# Altium PCB Buck_Converter.PcbDoc
Units mm, origin at the board's own origin, x right, y up, seen from the top; angles counter-clockwise.
Board outline 40 x 50 mm, 2 copper layers (Top Layer, Bottom Layer); 29 components, 14 nets, 69 pads, 31 vias.
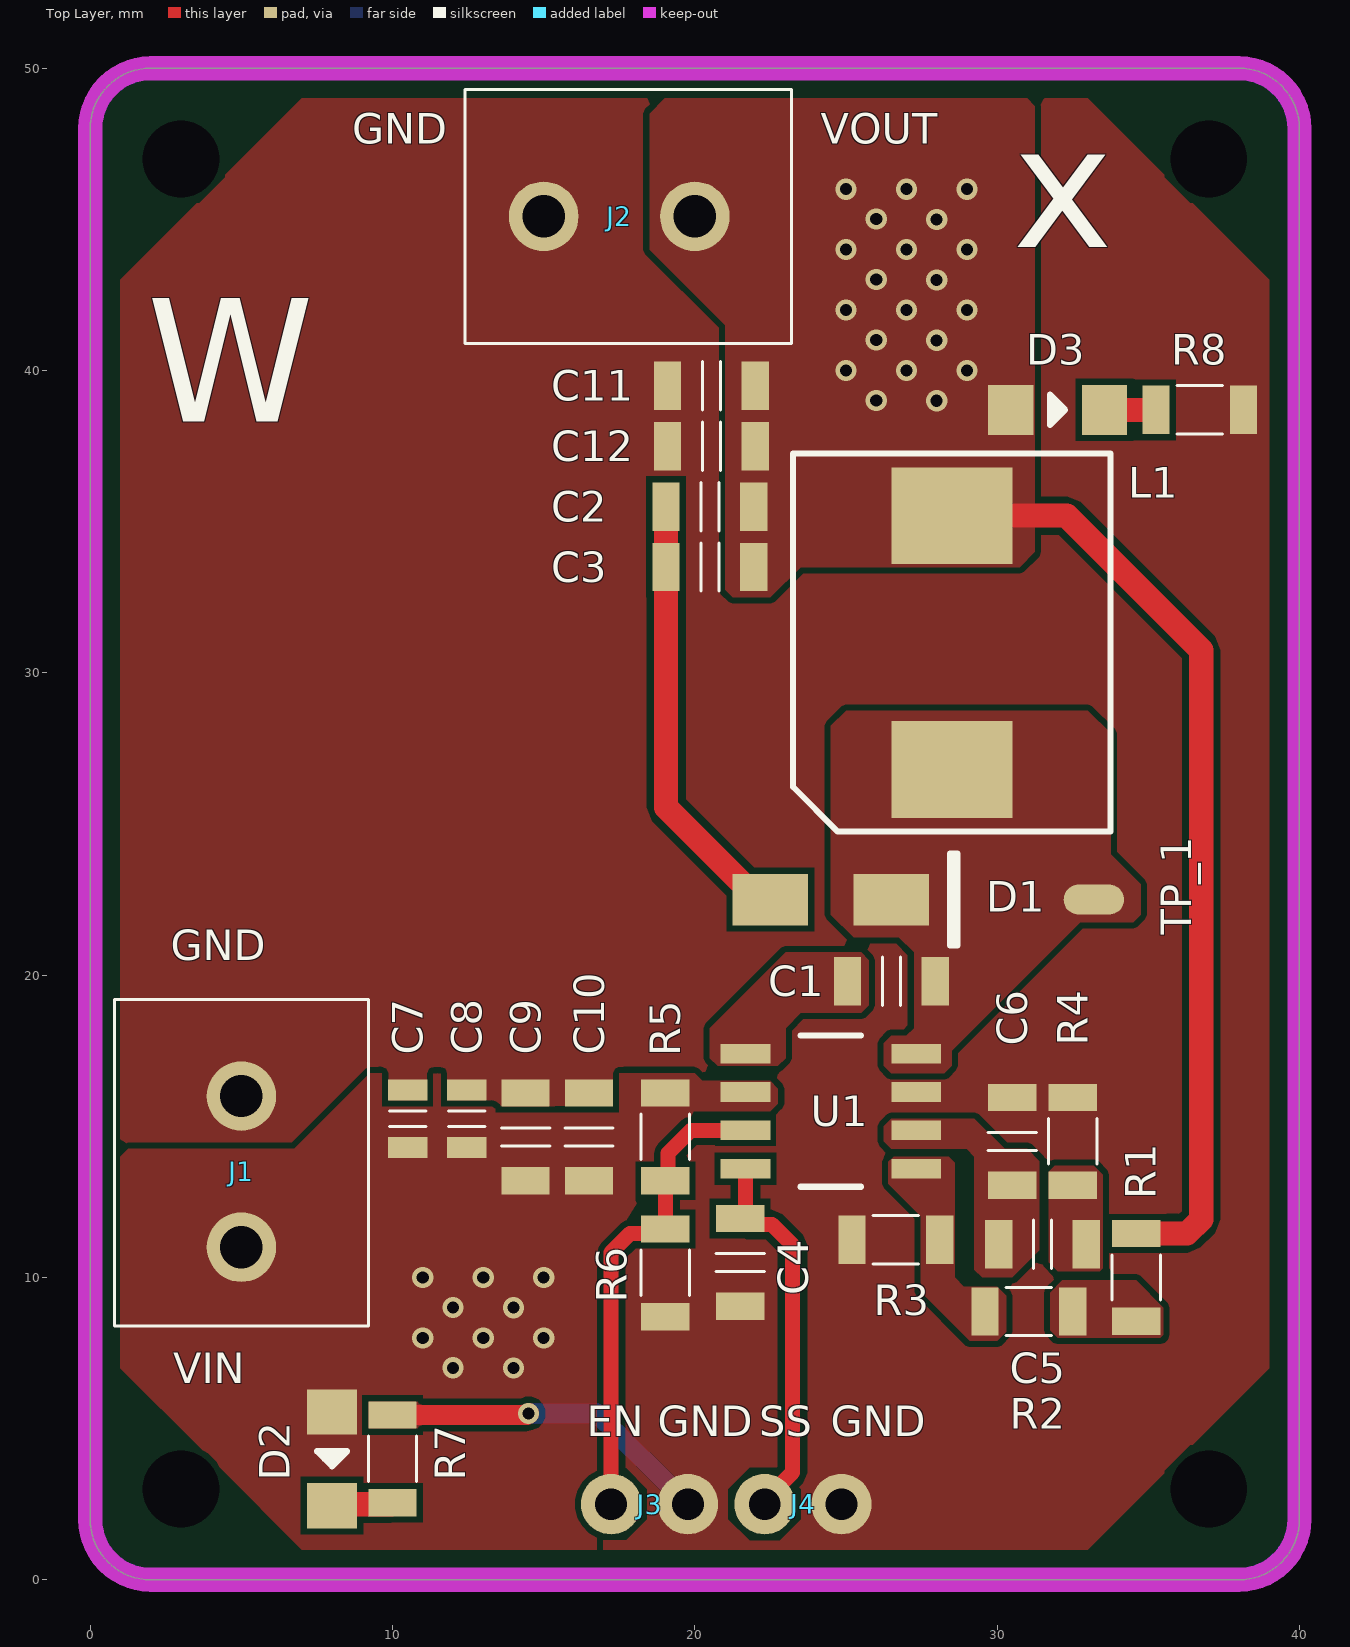
[diagram p0: Top Layer view]
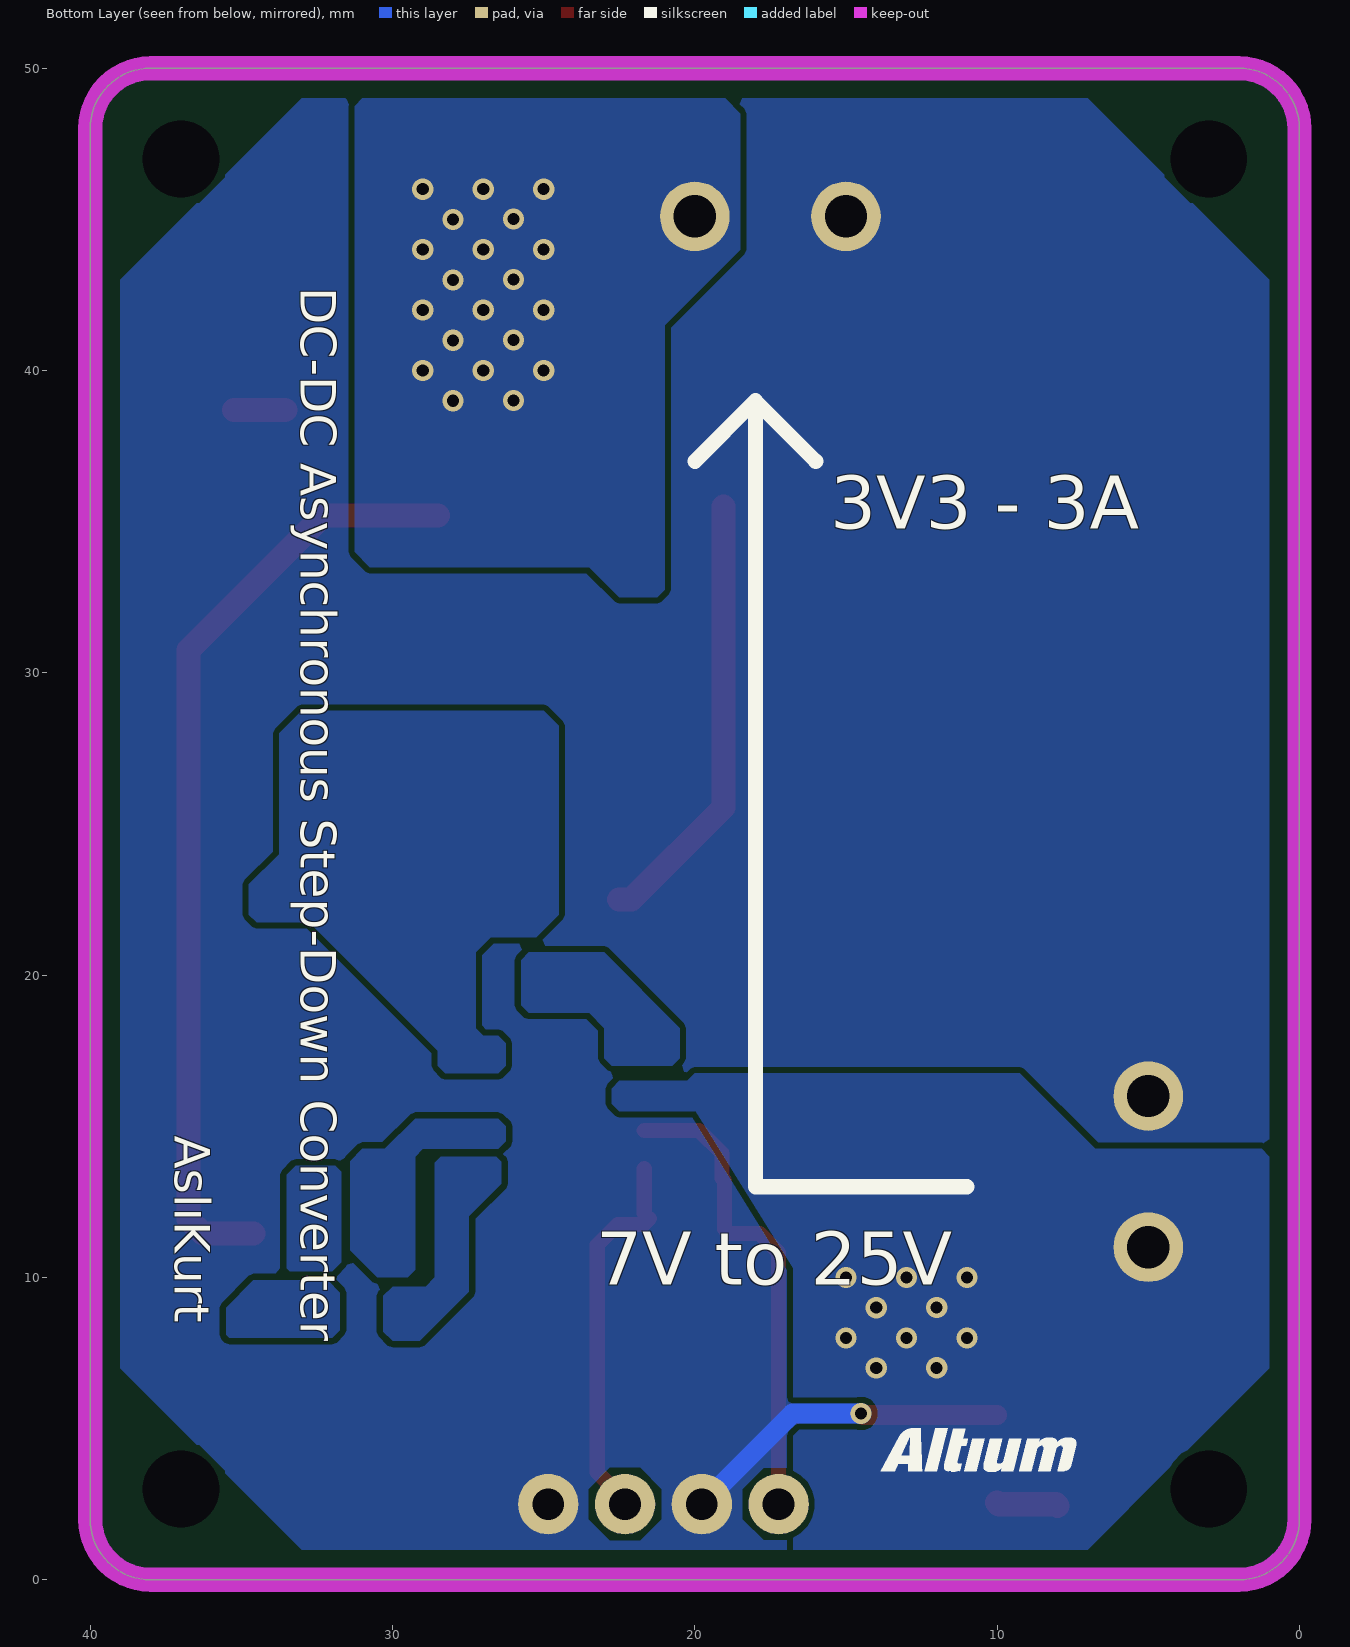
[diagram p1: Bottom Layer view, seen from below]
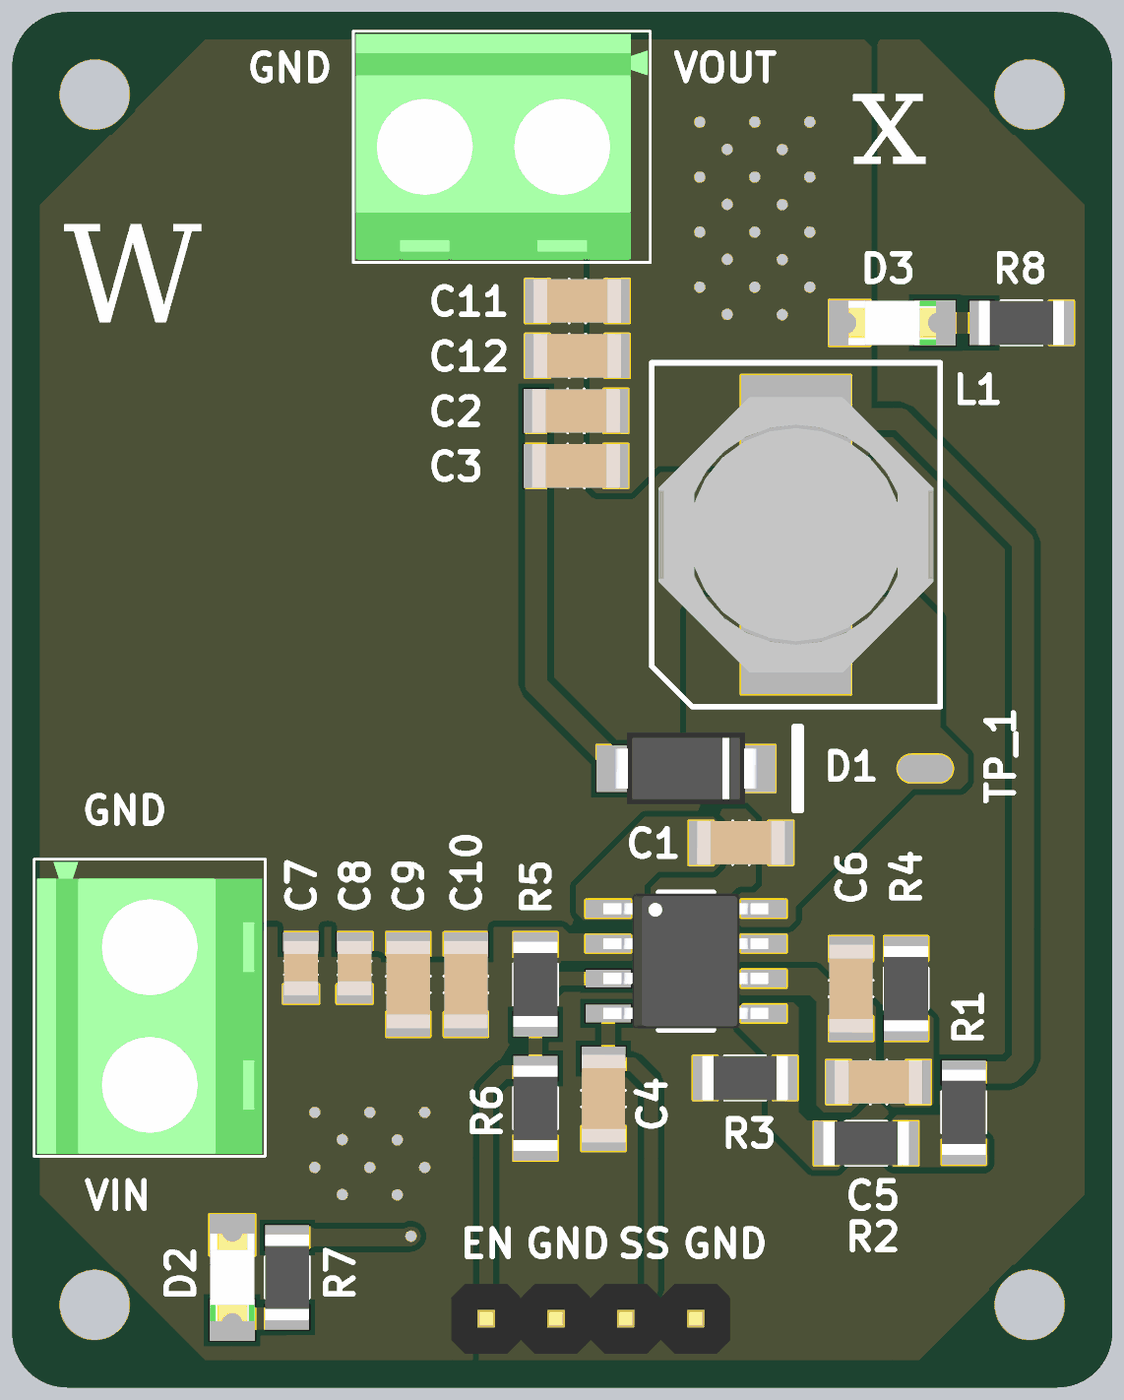
[diagram p2: 3D render of the assembled board from above, using the file's embedded part models]

## Layer stack, top to bottom
Top Solder: solder mask 0.0102, Solder Resist, Dk 3.5
Top Layer: signal copper 0.0356
Dielectric 1: dielectric 0.32, FR-4, Dk 4.8
Bottom Layer: signal copper 0.0356
Bottom Solder: solder mask 0.0102, Solder Resist, Dk 3.5

## Board outline
0,2 0,48 cw(c2,48) 2,50 38,50 cw(c38,48) 40,48 40,2 cw(c38,2) 38,0 2,0 cw(c2,2)

## Design rules (kind name [scope] priority, off if disabled: settings)
Clearance [All] p1: gap=0.2 ignorepadtopadclearanceinfootprint=FALSE except(0.35: Arc-THPad Track-THPad)
ComponentClearance [All] p1: gap=0 collisioncheckmode=3 verticalgap=0 showdistances=FALSE donotcheckwithout3dbody=TRUE
HoleSize [All] p1: absolutevalues=TRUE maxlimit=6.3 minlimit=0.15 maxpercent=80.000 minpercent=20.000
MinimumAnnularRing [All] p1: minimumring=0.15
PlaneClearance [All] p1: clearance=0.3
PlaneConnect [All] p1: planeconnectstyle=Direct reliefexpansion=0.508 reliefentries=4 reliefconductorwidth=0.254 reliefairgap=0.254
PolygonConnect [All] p1: connectstyle=Direct reliefconductorwidth=0.254 reliefentries=4 polygonreliefangle="90 Angle" airgapwidth=0.254
RoutingVias [All] p1: holewidth=0.5 width=0.65 viastyle="Through Hole" minholewidth=0.2 minwidth=0.35 maxholewidth=2 maxwidth=0.35
SilkToSilkClearance [All] p1: silktosilkclearance=0.3
SilkToSolderMaskClearance [IsPad] p1: minsilkscreentomaskgap=0.2 clearancetoexposedcopper=TRUE
SolderMaskExpansion [All] p1: expansion=0.05 istentingtop=FALSE
UnRoutedNet [All] p1: checkbadconnections=TRUE
Width [All] p1: maxlimit=50 minlimit=0.16 preferedwidth=10 minimp=50.000000 maximp=50.000000 favimp=50.000000
23 further rules are at their usual default settings.

## Components (designator, comment, footprint, x,y, rotation, side; value= is the part's Value field where it differs from the comment)
C1 "C1206C104J5RAC7800" CAP_1206 26.5,19.8 r0 top
C2 "GMC31X5R476M25NT" CAP_1206 20.5,35.5 r0 top
C3 "GMC31X5R476M25NT" CAP_1206 20.5,33.5 r0 top
C4 "C1206C104J5RAC7800" CAP_1206 21.5,10.5 r90 top
C5 "C3216C0G2J102J085AA" CAP_1206 31.5,11.1 r180 top
C6 "C1206C470J5GAC7800" CAP_1206 30.5,14.5 r270 top
C7 "CL21A475KAQNNNE" CAP_0805 10.5,15.25 r270 top
C8 "CL21A475KAQNNNE" CAP_0805 12.45,15.25 r270 top
C9 "C1206C104J5RAC7800" CAP_1206 14.4,14.65 r270 top
C10 "C3216C0G2J103J160AA" CAP_1206 16.5,14.65 r270 top
C11 "C1206C104J5RAC7800" CAP_1206 20.55,39.5 r0 top
C12 "C3216C0G2J103J160AA" CAP_1206 20.55,37.5 r0 top
D1 "B340AE-13" SMA 24.5,22.5 r0 top
D2 "150120BS75000" LED_BLUE_1206 8,4 r90 top
D3 "150120GS75000" LED_GREEN_1206 32,38.7 r180 top
J1 "282836-2" TERMINAL 5,13.5 r90 top
J2 "282836-2" TERMINAL 17.5,45.1 r0 top
J3 "2x1 Male Header 2.54mm" "2x1 Male Header 2.54mm" 18.5,2.5 r180 top
J4 "2x1 Male Header 2.54mm" "2x1 Male Header 2.54mm" 23.58,2.5 r180 top
L1 "SRI1004" IND_1010 28.5,31 r90 top
R1 "PMR18EZPJ000" RES_1206 34.6,10 r90 top
R2 "RC1206JR-0710KL" RES_1206 31.05,8.875 r0 top
R3 "RC1206JR-073K3L" RES_1206 26.65,11.25 r0 top
R4 "RES 33K OHM 5% 1/4W 1206" RES_1206 32.5,14.5 r270 top
R5 "RES 330K OHM 5% 1/4W 1206" RES_1206 19.025,14.65 r90 top
R6 "RES 68K OHM 5% 1/4W 1206" RES_1206 19.025,10.15 r90 top
R7 "RC1206FR-07680RL" RES_1206 10,4 r270 top
R8 "RC1206FR-07680RL" RES_1206 36.7,38.7 r180 top
U1 "IC REG BUCK ADJ 3A 8SOIC" SOIC8_PAD 24.5,15.5 r0 top

## Footprints (in the part's own frame and the unit in brackets; to place one, negate y for a bottom-side part, rotate by r counter-clockwise, add the part's x,y. Pads: shape width x height; smd on the part's side, far side on the other; paste and mask are expansions set on the pad)
"2x1 Male Header 2.54mm" [mm]
  round 2 hole 1.05 mask+0.05: 1(-1.27,0) 2(1.27,0)
  body extent -2.54,-1.27 2.54,1.27, height 8.54
CAP_0805 [mm]
  rect 0.7x1.3 smd mask+0.05: 1(-0.95,0) 2(0.95,0)
  silkscreen extent -0.25,-0.6 0.25,0.6, body extent -1,-0.63 1,0.63, height 0.6
CAP_1206 [mm]
  rect 0.9x1.6 smd mask+0.05: 1(-1.45,0) 2(1.45,0)
  silkscreen extent -0.3,-0.8 0.3,0.8, body extent -1.6,-0.8 1.6,0.8, height 0.79
IND_1010 [mm] "10.00 x 10.00 x 4.50mm"
  rect 3.2x4 smd mask+0.05: 1(-4.2,0) 2(4.2,0)
  silkscreen extent -6.25,-5.25 6.25,5.25, body extent -5,-5 5,5, height 3.8
LED_BLUE_1206 [mm]
  rect 1.5x1.66 smd mask+0.05: 1(-1.55,0) 2(1.55,0)
  silkscreen extent -0.25,-0.5 0.25,0.5, body extent -1.6,-0.8 1.6,0.8, height 0.68
LED_GREEN_1206 [mm]
  rect 1.5x1.66 smd mask+0.05: 1(-1.55,0) 2(1.55,0)
  silkscreen extent -0.25,-0.5 0.25,0.5, body extent -1.6,-0.8 1.6,0.8, height 0.68
RES_1206 [mm]
  rect 0.9x1.6 smd mask+0.05: 1(-1.45,0) 2(1.45,0)
  silkscreen extent -0.75,-0.8 0.75,0.8, body extent -1.55,-0.8 1.55,0.8, height 0.65
SMA [mm]
  rect 2.5x1.7 smd mask+0.05: 1(-2,0) 2(2,0)
  silkscreen extent 3.94,-1.52 4.19,1.52, body extent -2.6,-1.3 2.6,1.3, height 2.4
SOIC8_PAD [mm] "SOIC, 8-Leads, Body 4,90x3,90mm, Pitch 1,27mm, Thermal Pad 3,45x2,56mm, IPC Low Density"
  rect 1.65x0.65 smd: 1(-2.825,1.905) 2(-2.825,0.635) 3(-2.825,-0.635) 4(-2.825,-1.905) 5(2.825,-1.905) 6(2.825,-0.635) 7(2.825,0.635) 8(2.825,1.905)
  silkscreen extent -1,-2.5 1,2.5, body extent -3,-2.45 3,2.45, height 1.75
TERMINAL [mm] "5MM"
  round 2.3 hole 1.4 mask+0.05: 1(-2.5,0) 2(2.5,0)
  silkscreen extent -5.1,-4.2 5.7,4.2, body extent -5,-4.1 5.6,4.1, height 10

## Part data
C1 C4 C9 C11: library part "CAP CER 100nF 1206", "CAP CER 0.1UF 50V X7R 1206", Capacitance=100nF, Case Code (Metric)=3216, Case Code (Imperial)=1206, Dielectric=X7R, Manufacturer="Kyocera AVX", Manufacturer Part Number=12065C104JAT2A, Max Operating Temperature=125°C, Min Operating Temperature=-55°C, Package Quantity=4000, Supplier Part Number 1=1441626, Tolerance=5%, Voltage Rating=50V, Case/Package=1206, Category="Ceramic Capacitors", ComponentLink1Description=https://datasheet.ciiva.com/26915/getdatasheetpartid-87553-26915356.pdf?src-supplier=Verical, ComponentLink1URL=https://datasheet.ciiva.com/26915/getdatasheetpartid-87553-26915356.pdf?src-supplier=Verical, ComponentLink2Description=https://datasheet.ciiva.com/27747/740463-27747550.pdf?src-supplier=Jameco, ComponentLink2URL=https://datasheet.ciiva.com/27747/740463-27747550.pdf?src-supplier=Jameco, ComponentLink3Description=https://datasheet.ciiva.com/7094/1818074-7094222.pdf?src-supplier=Newark, ComponentLink3URL=https://datasheet.ciiva.com/7094/1818074-7094222.pdf?src-supplier=Newark, ComponentLink4Description=https://datasheet.ciiva.com/11463/cx7r-11463226.pdf?src-supplier=Avnet, ComponentLink4URL=https://datasheet.ciiva.com/11463/cx7r-11463226.pdf?src-supplier=Avnet, ComponentLink5Description=https://datasheet.ciiva.com/16318/cx7r-16318250.pdf?src-supplier=Future+Electronics, ComponentLink5URL=https://datasheet.ciiva.com/16318/cx7r-16318250.pdf?src-supplier=Future+Electronics, ComponentLink6Description=https://datasheet.ciiva.com/11505/cx7r-11505336.pdf?src-supplier=Avnet, ComponentLink6URL=https://datasheet.ciiva.com/11505/cx7r-11505336.pdf?src-supplier=Avnet, ComponentLink7Description=https://datasheet.ciiva.com/7833/84526-7833657.pdf?src-supplier=Element14, ComponentLink7URL=https://datasheet.ciiva.com/7833/84526-7833657.pdf?src-supplier=Element14, ComponentLink8Description=https://datasheet.ciiva.com/8081/1679506-8081368.pdf?src-supplier=Element14, ComponentLink8URL=https://datasheet.ciiva.com/8081/1679506-8081368.pdf?src-supplier=Element14, ComponentLink9Description=https://datasheet.ciiva.com/7833/cx7r-7833399.pdf?src-supplier=Element14, ComponentLink9URL=https://datasheet.ciiva.com/7833/cx7r-7833399.pdf?src-supplier=Element14, ComponentLink10Description=https://datasheet.ciiva.com/152/cx7r-152041.pdf?src-supplier=Digikey, ComponentLink10URL=https://datasheet.ciiva.com/152/cx7r-152041.pdf?src-supplier=Digikey, ComponentLink11Description=https://datasheet.ciiva.com/152/cx7r-152040.pdf?src-supplier=Digikey, ComponentLink11URL=https://datasheet.ciiva.com/152/cx7r-152040.pdf?src-supplier=Digikey, ComponentLink12Description=https://datasheet.ciiva.com/152/cx7r-152042.pdf?src-supplier=Digikey, ComponentLink12URL=https://datasheet.ciiva.com/152/cx7r-152042.pdf?src-supplier=Digikey, ComponentLink13Description=https://datasheet.ciiva.com/14604/70001075-14604380.pdf?src-supplier=Allied+Electronics, ComponentLink13URL=https://datasheet.ciiva.com/14604/70001075-14604380.pdf?src-supplier=Allied+Electronics, DesignedBy="Aslı Kurt", Height=0.5mm, Lead Free=5697LeadFree, Length=3.2mm, Material=4241ConductorMaterial, Mount="Surface Mount", Packaging="Cut Tape", Pricing 1="4000=0,049, 12000=0,048 (GBP)", Pricing 2="4000=0,04296 (USD)", Pricing 3="4000=0,0373, 12000=0,0364, 20000=0,036, 60000=0,0351, 100000=0,0344 (USD)", Pricing 4="1=0,22, 10=0,105, 50=0,105, 100=0,066, 1000=0,062, 10000=0,041 (USD)", RoHS=Yes, RoHS Compliant=Yes, Series=-, Stock 1=8700, Stock 2=40000, Stock 3=916000, Stock 4=79343, Supplier 1=Rs, Supplier 2=Avnet, Supplier 3="Future Electronics", Supplier 4=Mouser, Supplier Part Number 2=KGM31BR71H104JT, Supplier Part Number 3=1247949, Supplier Part Number 4=581-12065C104J, Termination=SMD/SMT, Voltage Rating (DC)=50V, Weight=0.000571oz, Width=1.6mm
C2 C3: library part "CAP CER 47uF 1206", "CAP CER 47UF 25V X5R 1206", Capacitance=47uF, Case/Package=1206, Manufacturer="Cal-Chip Electronics", Max Operating Temperature=85°C, Min Operating Temperature=-55°C, Supplier Part Number 1=4713-GMC31X5R476M25NTCT-ND, Tolerance=20%, Voltage Rating=25V, Category="Ceramic Capacitors", ComponentLink1Description=http://www.calchipelectronics.com/pdf/gmc_series.pdf?src-supplier=Digikey, ComponentLink1URL=http://www.calchipelectronics.com/pdf/gmc_series.pdf?src-supplier=Digikey, DesignedBy="Aslı Kurt", Manufacturer Part Number=GMC31X5R476M25NT, Mount="Surface Mount", Pricing 1="1=0,99, 10=0,613, 50=0,4602, 100=0,4126, 500=0,33138, 1000=0,30602 (USD)", Pricing 2="1=0,99, 10=0,613, 50=0,4602, 100=0,4126, 500=0,33138, 1000=0,30602 (USD)", Pricing 3="2000=0,28788, 4000=0,27032, 6000=0,26149, 10000=0,25165, 14000=0,24588, 20000=0,24032 (USD)", RoHS=Yes, Series=GMC, Stock 1=38887, Stock 2=38887, Stock 3=38000, Supplier 1=Digikey, Supplier 2=Digikey, Supplier 3=Digikey, Supplier Part Number 2=4713-GMC31X5R476M25NTDKR-ND, Supplier Part Number 3=4713-GMC31X5R476M25NTTR-ND
C5: library part "CAP CER 1nF 1206", "CAP CER 1nF 1206", Capacitance=1nF, Manufacturer=TDK, Supplier Part Number 1=810-C3216C0G2J102J, Category="Ceramic Capacitors", ComponentLink1Description=https://datasheet.ciiva.com/24219/c3216c0g2j102j085aa-265301-24219668.pdf?src-supplier=Mouser, ComponentLink1URL=https://datasheet.ciiva.com/24219/c3216c0g2j102j085aa-265301-24219668.pdf?src-supplier=Mouser, ComponentLink2Description=https://datasheet.ciiva.com/11788/0900766b80fc5cba-11788148.pdf?src-supplier=Rs, ComponentLink2URL=https://datasheet.ciiva.com/11788/0900766b80fc5cba-11788148.pdf?src-supplier=Rs, ComponentLink3Description=https://datasheet.ciiva.com/7726/1484596-7726604.pdf?src-supplier=Element14, ComponentLink3URL=https://datasheet.ciiva.com/7726/1484596-7726604.pdf?src-supplier=Element14, DesignedBy="Aslı Kurt", Manufacturer Part Number=C3216C0G2J102J085AA, Material=4241ConductorMaterial, Pricing 1="1=0,26, 10=0,115, 50=0,115, 100=0,072, 1000=0,062, 10000=0,048 (USD)", Pricing 2="1=0,27, 10=0,154, 50=0,1098, 100=0,0961, 500=0,07266, 1000=0,06537 (USD)", RoHS=Yes, Stock 1=6821, Stock 2=72988, Supplier 1=Mouser, Supplier 2=Digikey, Supplier Part Number 2=445-2342-1-ND
C6: library part "CAP CER 47pF 1206", "CAP CER 47PF 50V C0G/NP0 1206", Capacitance=47pF, Case Code (Metric)=3216, Case Code (Imperial)=1206, Dielectric=C0G, Dielectric Material=Ceramic, Manufacturer=KEMET, Manufacturer Part Number=C1206C470J5GACTU, Max Operating Temperature=125°C, Min Operating Temperature=-55°C, Package Quantity=1, Supplier Part Number 1=80-C1206C470J5GACTU, Temperature Coefficient=30ppm/°C, Tolerance=5%, Voltage=50V, Case/Package=1206, Category="Ceramic Capacitors", ComponentLink1Description=https://datasheet.ciiva.com/7729/1691965-7729914.pdf?src-supplier=Element14, ComponentLink1URL=https://datasheet.ciiva.com/7729/1691965-7729914.pdf?src-supplier=Element14, ComponentLink2Description=https://datasheet.ciiva.com/7729/1691965-7729913.pdf?src-supplier=Element14, ComponentLink2URL=https://datasheet.ciiva.com/7729/1691965-7729913.pdf?src-supplier=Element14, ComponentLink3Description=https://datasheet.ciiva.com/28668/1789732-28668879.pdf?src-supplier=Element14, ComponentLink3URL=https://datasheet.ciiva.com/28668/1789732-28668879.pdf?src-supplier=Element14, ComponentLink4Description=https://datasheet.ciiva.com/14598/70095383-14598902.pdf?src-supplier=Allied+Electronics, ComponentLink4URL=https://datasheet.ciiva.com/14598/70095383-14598902.pdf?src-supplier=Allied+Electronics, ComponentLink5Description=https://datasheet.ciiva.com/14598/70095383-14598719.pdf?src-supplier=Allied+Electronics, ComponentLink5URL=https://datasheet.ciiva.com/14598/70095383-14598719.pdf?src-supplier=Allied+Electronics, ComponentLink6Description=https://datasheet.ciiva.com/11463/kem-c1003-c0g-smd-11463659.pdf?src-supplier=Avnet, ComponentLink6URL=https://datasheet.ciiva.com/11463/kem-c1003-c0g-smd-11463659.pdf?src-supplier=Avnet, ComponentLink7Description=https://datasheet.ciiva.com/2988/kem-c1003-c0g-smd-2988767.pdf?src-supplier=Avnet, ComponentLink7URL=https://datasheet.ciiva.com/2988/kem-c1003-c0g-smd-2988767.pdf?src-supplier=Avnet, Construction=Flat, Depth=1.6mm, Dissipation Factor=0.1%, Height=0.78mm, Lead Free=5697LeadFree, Length=3.2mm, Material=4241ConductorMaterial, Mount="Surface Mount,PCB", Packaging="Tape and Reel", Pricing 1="1=0,18, 10=0,089, 50=0,089, 100=0,051, 1000=0,035, 10000=0,026 (USD)", Pricing 2="500=0,022, 1000=0,019, 1500=0,017 (GBP)", Pricing 3="4000=0,0232, 8000=0,021, 24000=0,02 (USD)", Pricing 4="1=0,2, 10=0,112, 50=0,0788, 100=0,0685, 500=0,05114, 1000=0,04574 (USD)", Reach SVHC Compliant=No, RoHS=Yes, RoHS Compliant=Yes, Series=C, Stock 1=9133, Stock 2=8000, Stock 3=12000, Stock 4=41465, Supplier 1=Mouser, Supplier 2=Rs, Supplier 3="Arrow Electronics", Supplier 4=Digikey, Supplier Part Number 2=8029999, Supplier Part Number 3=C1206C470J5GACTU, Supplier Part Number 4=399-C1206C470J5GAC7800CT-ND, Termination=SMD/SMT, Thickness=0.035inch, Voltage Rating=50V, Voltage Rating (AC)=50V, Voltage Rating (DC)=50V, Width=0.063inch
C7 C8: library part "CAP CER 4.7uF 0805", "CAP CER 4.7uF %10 0805", Capacitance=4.7uF, Case Code (Metric)=2012, Case Code (Imperial)=0805, Dielectric=X5R, Manufacturer=Samsung, Max Operating Temperature=85°C, Min Operating Temperature=-55°C, Package Quantity=1, Supplier Part Number 1=1276-1244-1-ND, Tolerance=10%, Voltage Rating=25V, Case/Package=0805, Category="Ceramic Capacitors", ComponentLink1Description=https://datasheet.ciiva.com/25798/cl21a475kaqnnne-25798882.pdf?src-supplier=Digi-Key, ComponentLink1URL=https://datasheet.ciiva.com/25798/cl21a475kaqnnne-25798882.pdf?src-supplier=Digi-Key, Construction=Flat, Depth=1.25mm, Designed by=BERK, Height=1.25mm, Lead Free="Lead Free", Length=2mm, Manufacturer Part Number=CL21A475KAQNNNE, Mount="Surface Mount", Packaging="Tape and Reel", Pricing 1="1=0,11000, 10=0,08100, 50=0,04580, 100=0,03800, 500=0,02664, 1000=0,02205 (USD)", Radiation Hardening=No, RoHS=Yes, RoHS Compliant=Yes, Series=CL, Stock 1=1477018, Supplier 1=Digi-Key, Thickness=0.055inch, Voltage Rating (DC)=25V, Width=0.049inch
C10 C12: library part "CAP CER 10nF 1206", "CAP CER 10nF 1206", Capacitance=10nF, Manufacturer=TDK, Supplier Part Number 1=1795135, Temperature Coefficient=30ppm/°C, Category="Ceramic Capacitors", ComponentLink1Description=http://www.mouser.com/ds/2/400/lcc_commercial_highvoltage_en-520036.pdf?src-supplier=Mouser, ComponentLink1URL=http://www.mouser.com/ds/2/400/lcc_commercial_highvoltage_en-520036.pdf?src-supplier=Mouser, ComponentLink2Description=https://datasheet.octopart.com/C3216C0G2J103J160AA-TDK-datasheet-43914167.pdf?src-supplier=Newark, ComponentLink2URL=https://datasheet.octopart.com/C3216C0G2J103J160AA-TDK-datasheet-43914167.pdf?src-supplier=Newark, ComponentLink3Description=https://product.tdk.com/info/en/documents/chara_sheet/C3216C0G2J103J160AA.pdf?src-supplier=Digikey, ComponentLink3URL=https://product.tdk.com/info/en/documents/chara_sheet/C3216C0G2J103J160AA.pdf?src-supplier=Digikey, ComponentLink4Description=https://product.tdk.com/info/en/catalog/spec/mlccspec_commercial_general_midvoltage_en.pdf?src-supplier=Digikey, ComponentLink4URL=https://product.tdk.com/info/en/catalog/spec/mlccspec_commercial_general_midvoltage_en.pdf?src-supplier=Digikey, ComponentLink5Description=http://product.tdk.com/en/catalog/datasheets/mlcc_commercial_midvoltage_en.pdf?src-supplier=Avnet, ComponentLink5URL=http://product.tdk.com/en/catalog/datasheets/mlcc_commercial_midvoltage_en.pdf?src-supplier=Avnet, ComponentLink6Description=https://datasheet.octopart.com/C3216C0G2J103J160AA-TDK-datasheet-41194876.pdf?src-supplier=Future+Electronics, ComponentLink6URL=https://datasheet.octopart.com/C3216C0G2J103J160AA-TDK-datasheet-41194876.pdf?src-supplier=Future+Electronics, DesignedBy="Aslı Kurt", Lead Free=5697LeadFree, Manufacturer Part Number=C3216C0G2J103J160AA, Material=4241ConductorMaterial, Pricing 1="2000=0,092, 6000=0,095 (GBP)", Pricing 2="1=0,53, 10=0,316, 50=0,231, 100=0,2046, 500=0,1596, 1000=0,14555 (USD)", Pricing 3="264=0,1004 (USD)", Pricing 4="1=0,405, 15=0,32, 50=0,285, 250=0,235, 1000=0,195 (USD)", RoHS=Yes, Stock 1=9940, Stock 2=35379, Stock 3=264, Stock 4=1420, Supplier 1=Rs, Supplier 2=Digikey, Supplier 3="Arrow Electronics", Supplier 4="Future Electronics", Supplier Part Number 2=445-14625-1-ND, Supplier Part Number 3=C3216C0G2J103J160AA, Supplier Part Number 4=6103616
D1: library part B340A, "Rectifier Diode Schottky 40V 3A 2-Pin SMA T/R", Forward Current=3A, Manufacturer=Diodes, Supplier Part Number 1=B340AE-13DICT-ND, Category="Schottky Diodes", ComponentLink1Description=https://www.diodes.com/assets/Datasheets/B320AE-B345AE.pdf?src-supplier=Digikey, ComponentLink1URL=https://www.diodes.com/assets/Datasheets/B320AE-B345AE.pdf?src-supplier=Digikey, DesignedBy="Aslı Kurt", Manufacturer Part Number=B340AE-13, Pricing 1="1=0,37, 10=0,248, 100=0,1671, 500=0,1296, 1000=0,1171, 2000=0,10643 (USD)", Pricing 2="1=0,37, 10=0,248, 100=0,1671, 500=0,1296, 1000=0,1171, 2000=0,10643 (USD)", RoHS=Yes, Stock 1=232201, Stock 2=232201, Supplier 1=Digikey, Supplier 2=Digikey, Supplier Part Number 2=B340AE-13DIDKR-ND
D2: library part "LED BLUE 1206", "Led, Blue, 470 Nm, 3.2 V, 30 Ma, 145 Mcd Rohs Compliant: Yes", Case Code (Metric)=3216, Case Code (Imperial)=1206, Color=Blue, Forward Current=30mA, Forward Voltage=3.2V, Lens Color=Colorless, Manufacturer="Wurth Electronics", Max Operating Temperature=85°C, Min Operating Temperature=-40°C, Package Quantity=1, Supplier Part Number 1=8154243P, Test Current=20mA, Case/Package=1206, Category=LEDs, ComponentLink1Description=https://datasheet.ciiva.com/22656/150120bs75000-22656976.pdf?src-supplier=Element14, ComponentLink1URL=https://datasheet.ciiva.com/22656/150120bs75000-22656976.pdf?src-supplier=Element14, ComponentLink2Description=https://datasheet.ciiva.com/29279/759440-da-01-en-chipled-1206-w-kl-blau-150120bs75000-29279045.pdf?src-supplier=Conrad, ComponentLink2URL=https://datasheet.ciiva.com/29279/759440-da-01-en-chipled-1206-w-kl-blau-150120bs75000-29279045.pdf?src-supplier=Conrad, ComponentLink3Description=https://datasheet.ciiva.com/29561/150120bs75000-29561882.pdf?src-supplier=Digikey, ComponentLink3URL=https://datasheet.ciiva.com/29561/150120bs75000-29561882.pdf?src-supplier=Digikey, DesignedBy="Aslı Kurt", Dominant Wavelength=470nm, Height=0.69mm, Length=3.2mm, Lens Size=1.6mm, Lens Style=Clear,Flat,Rectangular, Lens Transparency=Clear, Luminous Intensity=145mcd, Manufacturer Part Number=150120BS75000, Mount="Surface Mount", Packaging="Cut Tape", Pricing 1="500=0,119, 750=0,113, 1500=0,11, 3000=0,104 (GBP)", Pricing 2="5=0,251, 10=0,213, 100=0,172, 500=0,156, 1000=0,153 (EUR)", Pricing 3="1=0,22, 50=0,211, 100=0,182, 500=0,158 (USD)", Pricing 4="1=0,23, 10=0,225, 50=0,211, 100=0,182, 1000=0,165, 10000=0,165 (USD)", Reach SVHC Compliant=Unknown, RoHS=Yes, RoHS Compliant=Yes, Series=WL-SMCW, Stock 1=2200, Stock 2=4482, Stock 3=25240, Stock 4=4085, Supplier 1=Rs, Supplier 2=Farnell, Supplier 3=Digikey, Supplier 4=Mouser, Supplier Part Number 2=2322084, Supplier Part Number 3=732-4989-1-ND, Supplier Part Number 4=710-150120BS75000, Viewing Angle=140°, Wavelength=470nm, Width=1.6mm
D3: library part "LED GREEN 1206", "WL-SMCW SMT Mono-Color Chip LED Waterclear", Case Code (Metric)=3216, Case Code (Imperial)=1206, Color=Green, Forward Current=30mA, Forward Voltage=3.2V, Lens Color=Colorless, Manufacturer="Wurth Electronics", Max Operating Temperature=85°C, Max Reverse Voltage (DC)=5V, Min Operating Temperature=-40°C, Package Quantity=1, Power Dissipation=105mW, Supplier Part Number 1=8154247P, Test Current=20mA, Case/Package=1206, Category=LEDs, ComponentLink1Description=https://datasheet.ciiva.com/22656/150120gs75000-22656979.pdf?src-supplier=Element14, ComponentLink1URL=https://datasheet.ciiva.com/22656/150120gs75000-22656979.pdf?src-supplier=Element14, ComponentLink2Description=https://datasheet.ciiva.com/29279/759441-da-01-en-chipled-1206-w-kl-gruen-150120gs75000-29279042.pdf?src-supplier=Conrad, ComponentLink2URL=https://datasheet.ciiva.com/29279/759441-da-01-en-chipled-1206-w-kl-gruen-150120gs75000-29279042.pdf?src-supplier=Conrad, ComponentLink3Description=https://datasheet.ciiva.com/48430/150120gs75000-eng-tds-48430053.pdf?src-supplier=Distrelec, ComponentLink3URL=https://datasheet.ciiva.com/48430/150120gs75000-eng-tds-48430053.pdf?src-supplier=Distrelec, ComponentLink4Description=https://datasheet.ciiva.com/29561/150120gs75000-29561884.pdf?src-supplier=Digikey, ComponentLink4URL=https://datasheet.ciiva.com/29561/150120gs75000-29561884.pdf?src-supplier=Digikey, ComponentLink5Description=https://datasheet.ciiva.com/29561/150120gs75000-29561883.pdf?src-supplier=Digikey, ComponentLink5URL=https://datasheet.ciiva.com/29561/150120gs75000-29561883.pdf?src-supplier=Digikey, ComponentLink6Description=https://datasheet.ciiva.com/29561/150120gs75000-29561885.pdf?src-supplier=Digikey, ComponentLink6URL=https://datasheet.ciiva.com/29561/150120gs75000-29561885.pdf?src-supplier=Digikey, DesignedBy="Aslı Kurt", Dominant Wavelength=520nm, Height=0.69mm, Length=3.2mm, Lens Size=1.6mm, Lens Style=Clear,Flat,Rectangular, Lens Transparency=Clear, Luminous Intensity=450mcd, Manufacturer Part Number=150120GS75000, Mount="Surface Mount", Packaging="Cut Tape", Pricing 1="500=0,119, 750=0,113, 1500=0,11, 3000=0,104 (GBP)", Pricing 2="100=0,172, 500=0,156, 1000=0,153 (EUR)", Pricing 3="1=0,23, 10=0,225, 50=0,211, 100=0,182, 1000=0,165, 10000=0,165 (USD)", Pricing 4="1=0,22, 50=0,211, 100=0,182, 500=0,158 (USD)", Reach SVHC Compliant=Unknown, Reverse Voltage=5V, RoHS=Yes, RoHS Compliant=Yes, Series=WL-SMCW, Stock 1=4450, Stock 2=6145, Stock 3=4986, Stock 4=22547, Supplier 1=Rs, Supplier 2=Farnell, Supplier 3=Mouser, Supplier 4=Digikey, Supplier Part Number 2=2322085RL, Supplier Part Number 3=710-150120GS75000, Supplier Part Number 4=732-4990-1-ND, Viewing Angle=140°, Wavelength=520nm, Width=1.6mm
J1 J2: library part "2x1 TERMINAL 5mm", "Connector, Terminal Block; Wire Receptacle; 2 Pos.; 16-30 AWG; 0.197 in. CL; Sid", Color=Green, Current=13.5A, Flammability Rating="UL94 V-0", Manufacturer="TE Connectivity", Max Operating Temperature=105°C, Max Supply Voltage (AC)=300V, Min Operating Temperature=-40°C, Package Quantity=300, Supplier Part Number 1=A98076-ND, Voltage Rating (DC)=250V, Approvals=UL, Category="Terminal Blocks", Closed End="No (Without)", ComponentLink1Description=https://datasheet.ciiva.com/7628/1731782-7628513.pdf?src-supplier=Element14, ComponentLink1URL=https://datasheet.ciiva.com/7628/1731782-7628513.pdf?src-supplier=Element14, ComponentLink2Description=https://datasheet.ciiva.com/16393/282836-2-16393382.pdf?src-supplier=Future+Electronics, ComponentLink2URL=https://datasheet.ciiva.com/16393/282836-2-16393382.pdf?src-supplier=Future+Electronics, ComponentLink3Description=https://datasheet.ciiva.com/15169/getdatasheetpartid-155855-15169553.pdf?src-supplier=Verical, ComponentLink3URL=https://datasheet.ciiva.com/15169/getdatasheetpartid-155855-15169553.pdf?src-supplier=Verical, ComponentLink4Description=https://datasheet.ciiva.com/11757/0900766b8002dc8a-11757385.pdf?src-supplier=Rs, ComponentLink4URL=https://datasheet.ciiva.com/11757/0900766b8002dc8a-11757385.pdf?src-supplier=Rs, ComponentLink5Description=https://datasheet.ciiva.com/823/eng-cd-282836-h10-823437.pdf?src-supplier=Digikey, ComponentLink5URL=https://datasheet.ciiva.com/823/eng-cd-282836-h10-823437.pdf?src-supplier=Digikey, ComponentLink6Description=https://datasheet.ciiva.com/3141/eng-cs-1308389-eurostyle-terminal-blocks-0607-3141118.pdf?src-supplier=Avnet, ComponentLink6URL=https://datasheet.ciiva.com/3141/eng-cs-1308389-eurostyle-terminal-blocks-0607-3141118.pdf?src-supplier=Avnet, ComponentLink7Description=https://datasheet.ciiva.com/30261/eng-cs-1308389-eurostyle-terminal-blocks-0607-30261813.pdf?src-supplier=Onlinecomponents.com, ComponentLink7URL=https://datasheet.ciiva.com/30261/eng-cs-1308389-eurostyle-terminal-blocks-0607-30261813.pdf?src-supplier=Onlinecomponents.com, Connector System=5937ConnectorSystem, Connector Type=Receptacle, Contact Material=Brass, Contact Plating=Tin, Current Rating=13.5A, Depth=8.2mm, Designed by="Aslı Kurt", ELV=Compliant, Housing Color=Green, Housing Material=Polyamide, Lead Free="Lead Free", Length=10.6mm, Manufacturer Part Number=282836-2, Max Current Rating=13.5A, Max Voltage Rating (AC)=300V, Mount="Through Hole", Number of Circuits=2, Number of Contacts=2, Number of Levels=1, Number of Poles=2, Number of Positions=2, Number of Positions Per Level=2, Number of Rows=1, Operating Supply Voltage=300V, Orientation=Straight, Packaging=Tray, Pitch=5mm, Plating=Brass, Pricing 1="1=0,6, 10=0,578, 25=0,576, 50=0,5566, 100=0,4666, 300=0,43743, 600=0,41315, 1200=0,36211, 5100=0,31593 (USD)", Radiation Hardening=No, Reach SVHC Compliant=Unknown, RoHS=Yes, RoHS Compliant=Yes, Screw Flange="No (Without)", Screwless Terminal Block="No (Without)", Series=Buchanan, Side Stackable="Yes (With)", Stock 1=33835, Supplier 1=Digikey, Tail Length=3.5mm, Termination=Solder, Thread Size=M3, Voltage=300V, Voltage Rating=300V, Width=10mm, Wire Gauge (Max)=30AWG, Wire Gauge (Min)=30AWG, Wire/Cable Gauge=30AWG, Insulation Material=Nylon, Interlock="Yes (With)"
L1: library part "IND 10uH", "10uH 10X10 4.8A - SMD Güç Bobini - SRI1004", Current=4.8A, Tolerance=20%, Inductance=10uH, ComponentLink1Description=Direncnet, ComponentLink1URL=https://www.direnc.net/10uh-10x10-48a-smd-guc-bobini-sri1004, ComponentLink2Description=Datasheet, ComponentLink2URL=https://pdf.direnc.net/upload/10uh-10x10-4-8a-smd-guc-bobini-sri1004-datasheet.pdf, DesignedBy="Aslı Kurt", Producer=CoreMaster
R1: library part "RES 0 OHM 1206", "Res Thick Film 1206 0 Ohm 5% Molded SMD Paper T/R", Case/Package=340Case, Manufacturer=Rohm, Max Current Rating=38.7A, Max Operating Temperature=155°C, Min Operating Temperature=-55°C, Resistance=0R, Supplier Part Number 1=3099053, Temperature Coefficient=100ppm/°C, Category="Chip SMD Resistors", ComponentLink1Description=https://datasheet.octopart.com/PMR18EZPJ000-Rohm-datasheet-115132289.pdf?src-supplier=Future+Electronics, ComponentLink1URL=https://datasheet.octopart.com/PMR18EZPJ000-Rohm-datasheet-115132289.pdf?src-supplier=Future+Electronics, DesignedBy="Aslı Kurt", Height=420um, Manufacturer Part Number=PMR18EZPJ000, Pricing 1="5000=0,154, 10000=0,151, 15000=0,149, 20000=0,148, 25000=0,144 (USD)", Pricing 2="1=0,94, 10=0,539, 25=0,438, 50=0,3766, 100=0,3254, 250=0,27044, 500=0,23676, 1000=0,20858 (USD)", RoHS=Yes, Stock 1=10000, Stock 2=20524, Supplier 1="Future Electronics", Supplier 2=Digikey, Supplier Part Number 2=846-PMR18EZPJ000CT-ND
R2: library part "RES 10K OHM 1206", "RES 10K OHM 5% 1/4W 1206", Case Code (Metric)=3216, Case Code (Imperial)=1206, Manufacturer=Yageo, Max Operating Temperature=155°C, Max Power Dissipation=250mW, Min Operating Temperature=-55°C, Package Quantity=1, Resistance=10kR, Resistance Tolerance=5%, Resistor Type="Thick Film", Supplier Part Number 1=4750733, Temperature Coefficient=100ppm/°C, Voltage Rating=200V, Case/Package=1206, Category="Chip SMD Resistors", ComponentLink1Description=https://datasheet.ciiva.com/29154/402664-da-01-en-smd-widerstand-chip1206-10-kohm-29154546.pdf?src-supplier=Conrad, ComponentLink1URL=https://datasheet.ciiva.com/29154/402664-da-01-en-smd-widerstand-chip1206-10-kohm-29154546.pdf?src-supplier=Conrad, ComponentLink2Description=https://datasheet.ciiva.com/7983/444357-7983813.pdf?src-supplier=Element14, ComponentLink2URL=https://datasheet.ciiva.com/7983/444357-7983813.pdf?src-supplier=Element14, ComponentLink3Description=https://datasheet.ciiva.com/2458/pyu-rc1206-51-rohs-l-4-2458636.pdf?src-supplier=Digikey, ComponentLink3URL=https://datasheet.ciiva.com/2458/pyu-rc1206-51-rohs-l-4-2458636.pdf?src-supplier=Digikey, ComponentLink4Description=https://datasheet.ciiva.com/2458/pyu-rc1206-51-rohs-l-4-2458637.pdf?src-supplier=Digikey, ComponentLink4URL=https://datasheet.ciiva.com/2458/pyu-rc1206-51-rohs-l-4-2458637.pdf?src-supplier=Digikey, ComponentLink5Description=https://datasheet.ciiva.com/2458/pyu-rc1206-51-rohs-l-4-2458635.pdf?src-supplier=Digikey, ComponentLink5URL=https://datasheet.ciiva.com/2458/pyu-rc1206-51-rohs-l-4-2458635.pdf?src-supplier=Digikey, DesignedBy="Aslı Kurt", Height=0.026inch, Lead Free="Lead Free", Length=0.122inch, Manufacturer Part Number=RC1206JR-0710KL, Number of Terminations=2, Packaging="Cut Tape", Power Rating=250mW, Pricing 1="5000=0,0034, 20000=0,0033, 75000=0,0031, 200000=0,003, 500000=0,0029 (USD)", Pricing 2="1=0,1, 10=0,024, 50=0,022, 100=0,0194, 500=0,01224, 1000=0,0102 (USD)", Reach SVHC Compliant=Unknown, RoHS=Yes, RoHS Compliant=Yes, Series=RC1206, Stock 1=145000, Stock 2=179700, Supplier 1="Future Electronics", Supplier 2=Digikey, Supplier Part Number 2=311-10KERCT-ND, Termination=SMD/SMT, Tolerance=5%, Voltage Rating (AC)=200V, Width=0.063inch
R3: library part "RES 3K3 OHM 1206", "RES 3.3K OHM 5% 1/4W 1206", Manufacturer=Yageo, Resistance=3.3kR, Supplier Part Number 1=9240586, Category="Chip SMD Resistors", ComponentLink1Description=https://datasheet.ciiva.com/29181/402605-da-01-en-smd-widerstand-chip1206-3-3-kohm-29181477.pdf?src-supplier=Conrad, ComponentLink1URL=https://datasheet.ciiva.com/29181/402605-da-01-en-smd-widerstand-chip1206-3-3-kohm-29181477.pdf?src-supplier=Conrad, ComponentLink2Description=https://datasheet.ciiva.com/2458/pyu-r-int-thick-7-2458662.pdf?src-supplier=Digikey, ComponentLink2URL=https://datasheet.ciiva.com/2458/pyu-r-int-thick-7-2458662.pdf?src-supplier=Digikey, ComponentLink3Description=https://datasheet.ciiva.com/2458/pyu-r-int-thick-7-2458663.pdf?src-supplier=Digikey, ComponentLink3URL=https://datasheet.ciiva.com/2458/pyu-r-int-thick-7-2458663.pdf?src-supplier=Digikey, ComponentLink4Description=https://datasheet.ciiva.com/2458/pyu-r-int-thick-7-2458664.pdf?src-supplier=Digikey, ComponentLink4URL=https://datasheet.ciiva.com/2458/pyu-r-int-thick-7-2458664.pdf?src-supplier=Digikey, ComponentLink5Description=https://datasheet.ciiva.com/7857/444357-7857499.pdf?src-supplier=Element14, ComponentLink5URL=https://datasheet.ciiva.com/7857/444357-7857499.pdf?src-supplier=Element14, ComponentLink6Description=https://datasheet.ciiva.com/7857/444357-7857500.pdf?src-supplier=Element14, ComponentLink6URL=https://datasheet.ciiva.com/7857/444357-7857500.pdf?src-supplier=Element14, DesignedBy="Aslı Kurt", Lead Free=5697LeadFree, Manufacturer Part Number=RC1206JR-073K3L, Pricing 1="10=0,0172, 100=0,0107, 500=0,0094, 1000=0,0081, 2500=0,0059, 5000=0,0037, 25000=0,0036, 50000=0,0035 (EUR)", Pricing 2="1=0,1, 10=0,025, 50=0,0158, 100=0,0133, 500=0,0092, 1000=0,00796 (USD)", RoHS=Yes, Stock 1=157764, Stock 2=317191, Supplier 1=Farnell, Supplier 2=Digikey, Supplier Part Number 2=311-3.3KERCT-ND
R4: library part "RES 33K OHM 1206", "SMD Chip Resistor, 33 kOhm, ï¿½ 5%, 250 mW, 1206 [3216 Metric], Thick Film, General Purpose", Manufacturer=Yageo, Manufacturer Part Number=RC1206JR-0733KL, Resistance=33kR, Supplier Part Number 1=311-33KERCT-ND, Voltage Rating (AC)=200V, Category="Chip SMD Resistors", ComponentLink1Description=https://datasheet.ciiva.com/29181/402729-da-01-en-smd-widerstand-chip1206-33-kohm-29181369.pdf?src-supplier=Conrad, ComponentLink1URL=https://datasheet.ciiva.com/29181/402729-da-01-en-smd-widerstand-chip1206-33-kohm-29181369.pdf?src-supplier=Conrad, ComponentLink2Description=https://datasheet.ciiva.com/7857/444357-7857487.pdf?src-supplier=Element14, ComponentLink2URL=https://datasheet.ciiva.com/7857/444357-7857487.pdf?src-supplier=Element14, ComponentLink3Description=https://datasheet.ciiva.com/16747/pyu-rc1206-51-rohs-l-4-16747052.pdf?src-supplier=Future+Electronics, ComponentLink3URL=https://datasheet.ciiva.com/16747/pyu-rc1206-51-rohs-l-4-16747052.pdf?src-supplier=Future+Electronics, DesignedBy="Aslı Kurt", Lead Free=5697LeadFree, Pricing 1="1=0,1, 10=0,023, 50=0,0184, 100=0,0133, 500=0,01122, 1000=0,00918 (USD)", Pricing 2="5000=0,0036, 20000=0,0035, 75000=0,0033, 200000=0,0032, 500000=0,0031 (USD)", RoHS=Yes, Stock 1=425111, Stock 2=75000, Supplier 1=Digikey, Supplier 2="Future Electronics", Supplier Part Number 2=1124239
R5: library part "RES 330K OHM 1206", Manufacturer=Yageo, Manufacturer Part Number=RC1206JR-07330KL, Resistance=330kR, Supplier Part Number 1=311-330KERCT-ND, Category="Chip SMD Resistors", ComponentLink1Description=https://datasheet.ciiva.com/29181/402842-da-01-en-smd-widerstand-chip1206-330-kohm-29181410.pdf?src-supplier=Conrad, ComponentLink1URL=https://datasheet.ciiva.com/29181/402842-da-01-en-smd-widerstand-chip1206-330-kohm-29181410.pdf?src-supplier=Conrad, ComponentLink2Description=https://datasheet.ciiva.com/2520/pyu-r-int-thick-7-2520647.pdf?src-supplier=Digikey, ComponentLink2URL=https://datasheet.ciiva.com/2520/pyu-r-int-thick-7-2520647.pdf?src-supplier=Digikey, ComponentLink3Description=https://datasheet.ciiva.com/2520/pyu-r-int-thick-7-2520648.pdf?src-supplier=Digikey, ComponentLink3URL=https://datasheet.ciiva.com/2520/pyu-r-int-thick-7-2520648.pdf?src-supplier=Digikey, ComponentLink4Description=https://datasheet.ciiva.com/2520/pyu-r-int-thick-7-2520649.pdf?src-supplier=Digikey, ComponentLink4URL=https://datasheet.ciiva.com/2520/pyu-r-int-thick-7-2520649.pdf?src-supplier=Digikey, ComponentLink5Description=https://datasheet.ciiva.com/7857/444357-7857483.pdf?src-supplier=Element14, ComponentLink5URL=https://datasheet.ciiva.com/7857/444357-7857483.pdf?src-supplier=Element14, ComponentLink6Description=https://datasheet.ciiva.com/7857/444357-7857484.pdf?src-supplier=Element14, ComponentLink6URL=https://datasheet.ciiva.com/7857/444357-7857484.pdf?src-supplier=Element14, ComponentLink7Description=https://datasheet.ciiva.com/28639/1675737-28639914.pdf?src-supplier=Element14, ComponentLink7URL=https://datasheet.ciiva.com/28639/1675737-28639914.pdf?src-supplier=Element14, ComponentLink8Description=https://datasheet.ciiva.com/17422/pyu-rc1206-51-rohs-l-4-17422334.pdf?src-supplier=Future+Electronics, ComponentLink8URL=https://datasheet.ciiva.com/17422/pyu-rc1206-51-rohs-l-4-17422334.pdf?src-supplier=Future+Electronics, DesignedBy="Aslı Kurt", Pricing 1="1=0,1, 10=0,023, 50=0,0188, 100=0,0143, 500=0,01274, 1000=0,01122 (USD)", RoHS=Yes, Stock 1=93095, Supplier 1=Digikey
R6: library part "RES 68K OHM 1206", Manufacturer=Yageo, Manufacturer Part Number=RC1206JR-0768KL, Resistance=68kR, Supplier Part Number 1=311-68KERCT-ND, Voltage Rating (AC)=200V, Category="Chip SMD Resistors", ComponentLink1Description=https://datasheet.ciiva.com/7857/444357-7857527.pdf?src-supplier=Element14, ComponentLink1URL=https://datasheet.ciiva.com/7857/444357-7857527.pdf?src-supplier=Element14, ComponentLink2Description=https://datasheet.ciiva.com/7857/444357-7857528.pdf?src-supplier=Element14, ComponentLink2URL=https://datasheet.ciiva.com/7857/444357-7857528.pdf?src-supplier=Element14, DesignedBy="Aslı Kurt", Lead Free=5697LeadFree, Pricing 1="1=0,1, 10=0,022, 50=0,0188, 100=0,0153, 500=0,01122, 1000=0,00918 (USD)", Pricing 2="1=0,1, 10=0,022, 50=0,0188, 100=0,0153, 500=0,01122, 1000=0,00918 (USD)", RoHS=Yes, Stock 1=105931, Stock 2=105931, Supplier 1=Digikey, Supplier 2=Digikey, Supplier Part Number 2=311-68KERDKR-ND
R7 R8: library part "RES 680 OHM 1206", "SMD Chip Resistor, 680 Ohm, ï¿½ 1%, 250 mW, 1206 [3216 Metric], Thick Film, General Purpose", Manufacturer=Yageo, Resistance=680R, Supplier Part Number 1=8645095, Voltage Rating (AC)=200V, Category="Chip SMD Resistors", ComponentLink1Description=https://datasheet.ciiva.com/11819/0900766b80c6630a-11819964.pdf?src-supplier=Rs, ComponentLink1URL=https://datasheet.ciiva.com/11819/0900766b80c6630a-11819964.pdf?src-supplier=Rs, ComponentLink2Description=https://datasheet.ciiva.com/7857/444357-7857386.pdf?src-supplier=Element14, ComponentLink2URL=https://datasheet.ciiva.com/7857/444357-7857386.pdf?src-supplier=Element14, ComponentLink3Description=https://datasheet.ciiva.com/7857/1686128-7857387.pdf?src-supplier=Element14, ComponentLink3URL=https://datasheet.ciiva.com/7857/1686128-7857387.pdf?src-supplier=Element14, ComponentLink4Description=https://datasheet.ciiva.com/7857/444357-7857388.pdf?src-supplier=Element14, ComponentLink4URL=https://datasheet.ciiva.com/7857/444357-7857388.pdf?src-supplier=Element14, ComponentLink5Description=https://datasheet.ciiva.com/46445/444357-46445718.pdf?src-supplier=Element14, ComponentLink5URL=https://datasheet.ciiva.com/46445/444357-46445718.pdf?src-supplier=Element14, ComponentLink6Description=https://datasheet.ciiva.com/17422/pyu-rc1206-51-rohs-l-4-17422460.pdf?src-supplier=Future+Electronics, ComponentLink6URL=https://datasheet.ciiva.com/17422/pyu-rc1206-51-rohs-l-4-17422460.pdf?src-supplier=Future+Electronics, DesignedBy="Aslı Kurt", Lead Free=5697LeadFree, Manufacturer Part Number=RC1206FR-07680RL, Pricing 1="5000=0,0057, 20000=0,0055, 75000=0,0052, 200000=0,0051, 500000=0,0049 (USD)", Pricing 2="100=0,012, 1000=0,007, 2500=0,005, 5000=0,005, 10000=0,005 (GBP)", Pricing 3="1=0,104, 25=0,026, 50=0,021, 100=0,016 (USD)", Pricing 4="5000=0,0058, 10000=0,005, 25000=0,005, 50000=0,0037, 125000=0,0036 (USD)", Pricing 5="1=0,1, 10=0,026, 50=0,0204, 100=0,0153, 500=0,01276, 1000=0,0102 (USD)", Pricing 6="1=0,1, 10=0,018, 50=0,018, 100=0,015, 1000=0,009, 10000=0,005 (USD)", RoHS=Yes, Stock 1=315000, Stock 2=2900, Stock 3=8860, Stock 4=830000, Stock 5=2188492, Stock 6=54929, Supplier 1="Future Electronics", Supplier 2=Rs, Supplier 3=Avnet, Supplier 4="Arrow Electronics", Supplier 5=Digikey, Supplier 6=Mouser, Supplier Part Number 2=1988442, Supplier Part Number 3=49AK3834, Supplier Part Number 4=RC1206FR-07680RL, Supplier Part Number 5=311-680FRCT-ND, Supplier Part Number 6=603-RC1206FR-07680RL
U1: library part TPS54331DR, "3.5V to 28V Input, 3A, 570kHz Step-Down Converter with Eco-mode 8-SOIC -40 to 150", Case/Package=D, Manufacturer="Texas Instruments", Max Operating Temperature=150°C, Max Output Current=3A, Max Output Voltage=25V, Max Input Voltage=28V, Min Operating Temperature=-40°C, Min Output Voltage=800mV, Min Input Voltage=3.5V, Package Quantity=1, Quiescent Current=110uA, Supplier Part Number 1=296-26991-6-ND, Switching Frequency=570kHz, Category="Voltage Regulators - Switching", ComponentLink1Description=https://datasheet.ciiva.com/41462/001014850-da-01-en-ic-reg-buck-adj-3a-tps54331dr-soic-8-tid-41462698.pdf?src-supplier=Conrad, ComponentLink1URL=https://datasheet.ciiva.com/41462/001014850-da-01-en-ic-reg-buck-adj-3a-tps54331dr-soic-8-tid-41462698.pdf?src-supplier=Conrad, ComponentLink2Description=https://datasheet.ciiva.com/2034/tps54331-2034841.pdf?src-supplier=Digikey, ComponentLink2URL=https://datasheet.ciiva.com/2034/tps54331-2034841.pdf?src-supplier=Digikey, ComponentLink3Description=https://datasheet.ciiva.com/2034/tps54331-2034840.pdf?src-supplier=Digikey, ComponentLink3URL=https://datasheet.ciiva.com/2034/tps54331-2034840.pdf?src-supplier=Digikey, ComponentLink4Description=https://datasheet.ciiva.com/2034/tps54331-2034842.pdf?src-supplier=Digikey, ComponentLink4URL=https://datasheet.ciiva.com/2034/tps54331-2034842.pdf?src-supplier=Digikey, ComponentLink5Description=https://datasheet.ciiva.com/14303/tps54331-14303672.pdf?src-supplier=Avnet, ComponentLink5URL=https://datasheet.ciiva.com/14303/tps54331-14303672.pdf?src-supplier=Avnet, DesignedBy="Aslı Kurt", Height=1.5mm, Lead Free="Lead Free", Length=5mm, Manufacturer Part Number=TPS54331DR, Number of Channels=1NUMBER, Number of Outputs=1, Number of Pins=8, Operating Supply Voltage=28V, Output Configuration=Positive, Output Current=3A, Output Type=Adjustable, Output Voltage=25V, Packaging="Tape and Reel", Pricing 1="1=1,87, 10=1,322, 25=1,1864, 100=1,0368, 250=0,96548, 500=0,92248, 1000=0,88708 (USD)", Radiation Hardening=No, Reach SVHC Compliant=No, RoHS=Yes, RoHS Compliant=Yes, Series=Eco-Mode™, Stock 1=4154, Supplier 1=Digikey, Synchronous Rectifier=No, Thickness=1.58mm, Weight=0.002561oz, Width=4mm

## Free pads (board coordinates)
  round 2 hole 2.54 mask+0.05: ""(3,3) ""(3,47) ""(37,3) ""(37,47)
  oval 2x1 smd mask+0.05: ""(33.2,22.5)

## Via types
v1: diameter 0.7, hole 0.4, Top Layer to Bottom Layer, tented both sides, 31 vias

## Nets (pads, with @x,y where several pads share a name; then routed paths per layer and width w, separated by ;. In a path a pad name is that pad's centre, name@x,y a point inside that pad or via, vN(x,y) a via of type N, cw(c..) or ccw(c..) an arc to the next point about the centre after c; other vN are vias at no path point)
3V3: C2.2 C3.2 C11.2 C12.2 D3.2 J2.2 L1.2 R1.2 | length 31.3
  Top Layer w0.8: L1.2 32.3,35.2 36.75,30.75 36.75,11.919 36.281,11.45 R1.2
  other v1: 28,39 26,39.011 25,40 27,40 29,40 28,41 26,41.011 25,42 27,42 29,42 26,43.011 28,43 25,44 27,44 29,44 26,45.011 28,45 25,46 27,46 29,46
COMP: C5.2 C6.2 U1.6
ENABLE: J3.2 R5.1 R6.2 U1.3 | length 15.9
  Top Layer w0.5: J3.2 17.23,10.83 17.857,11.457 18.882,11.457 R6.2 R5.1 19.107,13.282 19.107,14.107 19.865,14.865 U1.3
GND: C4.1 C6.1 C7.1 C8.1 C9.1 C10.1 C11.1 C12.1 J1.2 J2.1 J3.1 J4.1 R3.1 R4.1 R6.1 R7.1 R8.1 U1.7 | length 11
  Top Layer w0.65: R7.1 14.436,5.45 14.486,5.5 v1(14.5,5.5)
  Bottom Layer w0.65: v1(14.5,5.5) 16.77,5.5 J3.1
NetC1_1: C1.1 U1.1
NetC1_2: C1.2 D1.2 L1.1 pad.@33.2,22.5 U1.8
NetC2_1: C2.1 C3.1 D1.1 | length 14.7
  Top Layer w0.8: C2.1 C3.1 19.05,25.55 22.1,22.5 D1.1
NetC5_1: C5.1 R4.2
NetD2_1: D2.1 R7.2 | length 2
  Top Layer w0.8: D2.1 8.05,2.5 9.95,2.5 R7.2
NetD3_1: D3.1 R8.2 | length 1.7
  Top Layer w0.8: D3.1 R8.2
NetR1_1: R1.1 R2.2
SS: C4.2 J4.2 U1.4 | length 12.5
  Top Layer w0.5: C4.2 21.7,11.75 22.55,11.75 23.23,11.07 23.23,3.543 22.31,2.623 J4.2 ; C4.2@21.675,12.125 U1.4
VCC: C7.2 C8.2 C9.2 C10.2 D2.2 J1.1 R5.2 U1.2
  other v1: 12,7.011 14,7 11,8 13,8 15,8 14,9 12,9.011 11,10 13,10 15,10
VSENSE: R2.1 R3.2 U1.5

## Polygon pours and split planes (outlines as drawn)
GND on Bottom Layer "GND_L02_P010" (solid, remove dead copper, pour order 10): 7,49 1,43 1,7 7,1 33,1 39,7 39,43 33,49
VCC on Bottom Layer "VCC_L02_P009" (solid, remove dead copper, pour order 9): 20,16.75 9.25,16.75 6.75,14.25 1.25,14.25 1,14 1,7 7,1 16.75,1 16.75,10.296 19.971,15.5 22.5,15.5 22.75,15.75 22.75,16.25 22.5,16.5 20.25,16.5
NetR1_1 on Bottom Layer "NETR1_1_L02_P000" (solid, pour order 0): 31.75,9.5 32.15,9.9 34.6,9.9 35.5,9 35.5,8.1 35.4,8 32,8 31.75,8.25
NetC1_2 on Bottom Layer "NETC1_2_L02_P003" (solid, pour order 3): 26.5,18 26.25,17.75 26.25,17 26.5,16.75 28.25,16.75 28.5,17 28.5,17.5 32.75,21.75 34.5,21.75 34.75,22 34.75,23 33.75,24 33.75,28 33,28.75 25,28.75 24.5,28.25 24.5,22 25.25,21.25 26.75,21.25 27.25,20.75 27.25,18.25 27,18
NetC1_1 on Bottom Layer "NETC1_1_L02_P004" (solid, pour order 4): 25.5,20.75 25.75,20.5 25.75,19 25.5,18.75 23.5,18.75 23,18.25 23,17.25 22.75,17 20.75,17 20.5,17.25 20.5,18.25 23,20.75
COMP on Bottom Layer "COMP_L02_P005" (solid, pour order 5): 26.5,15.25 26.25,15 26.25,14.5 26.5,14.25 29,14.25 29.25,14 29.25,10.25 29.5,10 30.5,10 31.4,10.9 31.4,13.85 31,14.25 30.25,14.25 29.25,15.25
NetC5_1 on Bottom Layer "NETC5_1_L02_P006" (solid, pour order 6): 31.7,13.3 31.7,10.5 32,10.2 33.4,10.2 33.5,10.3 33.5,10.4 33.5,13.4 33.2,13.7 31.9,13.7 31.7,13.5
VSENSE on Bottom Layer "VSENSE_L02_P007" (solid, pour order 7): 26.575,14 26.4,13.825 26.4,13.1 27.475,12.025 27.475,9.525 29.1,7.9 30,7.9 30.3,8.2 30.3,9.4 30,9.7 28.9,9.7 28.6,10 28.6,13.8 28.4,14
3V3 on Bottom Layer "3V3_L02_P008" (solid, pour order 8): 31.25,34 30.75,33.5 23.5,33.5 22.5,32.5 21.25,32.5 21,32.75 21,41.5 18.5,44 18.5,48.5 19,49 31,49 31.25,48.75
GND on Top Layer "GND_L01_P019" (solid, remove dead copper, pour order 19): 7,49 1,43 1,7 7,1 33,1 39,7 39,43 33,49
VCC on Top Layer "VCC_L01_P018" (solid, remove dead copper, pour order 18): 20,16.75 9.25,16.75 6.75,14.25 1.25,14.25 1,14 1,7 7,1 16.75,1 16.75,10.296 19.971,15.5 22.5,15.5 22.75,15.75 22.75,16.25 22.5,16.5 20.25,16.5
3V3 on Top Layer "3V3_L01_P017" (solid, pour order 17): 31.25,34 30.75,33.5 23.5,33.5 22.5,32.5 21.25,32.5 21,32.75 21,41.5 18.5,44 18.5,48.5 19,49 31,49 31.25,48.75
VSENSE on Top Layer "VSENSE_L01_P016" (solid, pour order 16): 26.575,14 26.4,13.825 26.4,13.1 27.475,12.025 27.475,9.525 29.1,7.9 30,7.9 30.3,8.2 30.3,9.4 30,9.7 28.9,9.7 28.6,10 28.6,13.8 28.4,14
NetC5_1 on Top Layer "NETC5_1_L01_P015" (solid, pour order 15): 31.7,13.3 31.7,10.5 32,10.2 33.4,10.2 33.5,10.3 33.5,10.4 33.5,13.4 33.2,13.7 31.9,13.7 31.7,13.5
COMP on Top Layer "COMP_L01_P014" (solid, pour order 14): 26.5,15.25 26.25,15 26.25,14.5 26.5,14.25 29,14.25 29.25,14 29.25,10.25 29.5,10 30.5,10 31.4,10.9 31.4,13.85 31,14.25 30.25,14.25 29.25,15.25
NetC1_1 on Top Layer "NETC1_1_L01_P013" (solid, pour order 13): 25.5,20.75 25.75,20.5 25.75,19 25.5,18.75 23.5,18.75 23,18.25 23,17.25 22.75,17 20.75,17 20.5,17.25 20.5,18.25 23,20.75
NetC1_2 on Top Layer "NETC1_2_L01_P012" (solid, pour order 12): 26.5,18 26.25,17.75 26.25,17 26.5,16.75 28.25,16.75 28.5,17 28.5,17.5 32.75,21.75 34.5,21.75 34.75,22 34.75,23 33.75,24 33.75,28 33,28.75 25,28.75 24.5,28.25 24.5,22 25.25,21.25 26.75,21.25 27.25,20.75 27.25,18.25 27,18
NetR1_1 on Top Layer "NETR1_1_L01_P011" (solid, pour order 11): 31.75,9.5 32.15,9.9 34.6,9.9 35.5,9 35.5,8.1 35.4,8 32,8 31.75,8.25

## Keep-outs
Keep-Out Layer:
  lines w0.4: 2,-0.2 38,-0.2 ; 2,-0.2 cw(c2,2) -0.2,2 -0.2,48 ; 38,-0.2 ccw(c38,2) 40.2,1.999 ; -0.2,48 cw(c2,48) 1.999,50.2 ; -0.2,48 -0.2,48 ; 0.2,48 cw(c2,48) 2,49.8 ; 0.2,48 0.2,48 ; 0.2,48 0.2,2 ccw(c2,2) 2,0.2 38,0.2 ; 1.999,50.2 cw(c2,50) 2,50.2 ; 1.999,50.2 cw(c2,48) 2,50.2 ; 2,49.8 ccw(c2,50) 2.001,49.8 ; 2,49.8 2.001,49.8 ; 2,50.2 38,50.2 ; 2.001,49.8 37.999,49.8 ; 37.999,49.8 ccw(c38,50) 38,49.8 ; 37.999,49.8 38,49.8 ; 38,-0.2 38,-0.2 ; 38,0.2 ccw(c38,2) 39.8,2 ; 38,0.2 38,0.2 ; 38,49.8 cw(c38,48) 39.8,48 ; 38,50.2 cw(c38,48) 38.001,50.2 ; 38,50.2 cw(c38,50) 38.001,50.2 ; 38.001,50.2 cw(c38,48) 40.2,48.001 ; 39.8,2 cw(c40,2) 39.8,2.001 ; 39.8,2 39.8,2.001 ; 39.8,2.001 39.8,47.999 ; 39.8,47.999 cw(c40,48) 39.8,48 ; 39.8,47.999 39.8,48 ; 40.2,1.999 ccw(c40,2) 40.2,2 ; 40.2,1.999 ccw(c38,2) 40.2,2 ; 40.2,2 40.2,48 ; 40.2,48 ccw(c40,48) 40.2,48.001 ; 40.2,48 ccw(c38,48) 40.2,48.001

## Silkscreen, mask and mechanical layers (free items; w line width, h text height)
Top Overlay:
  text "GND" at 8.667,47.5 h1
  text "VOUT" at 24.167,47.5 h1
  text "x" at 30.515,42.734 h7
  text "W" at 1.862,36.962 h7
  text "TP_1" at 36.417,21.334 h1 r90
  text "GND" at 2.667,20.5 h1
  text "VIN" at 2.75,6.5 h1
  text "EN" at 16.417,4.75 h1
  text "GND" at 18.778,4.75 h1
  text "SS" at 22.138,4.75 h1
  text "GND" at 24.499,4.75 h1
Bottom Overlay:
  drawing of 10 lines, arcs and shapes, not listed
  text "DC-DC Asynchronous Step-Down Converter" at 33.416,42.749 h2 r90
  text "3V3 - 3A" at 15.521,34.182 h3
  text "AslıKurt" at 37.581,14.686 h2 r90
  text "7V to 25V" at 23.258,9.182 h3
Drill Drawing:
  the board outline again, w0.2